# EAGLE board substractor-741_p-stm-v1.1 (EAGLE 6.5.0)
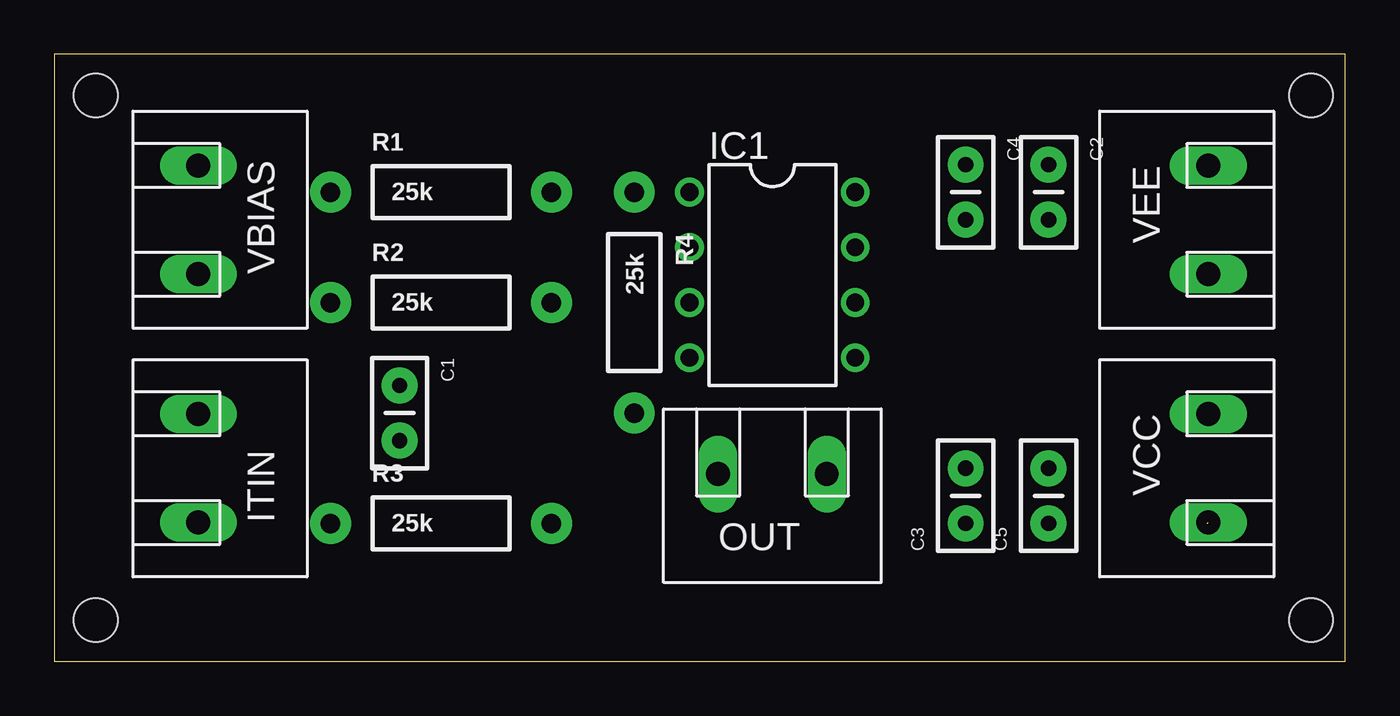
[diagram p0: board, top side]
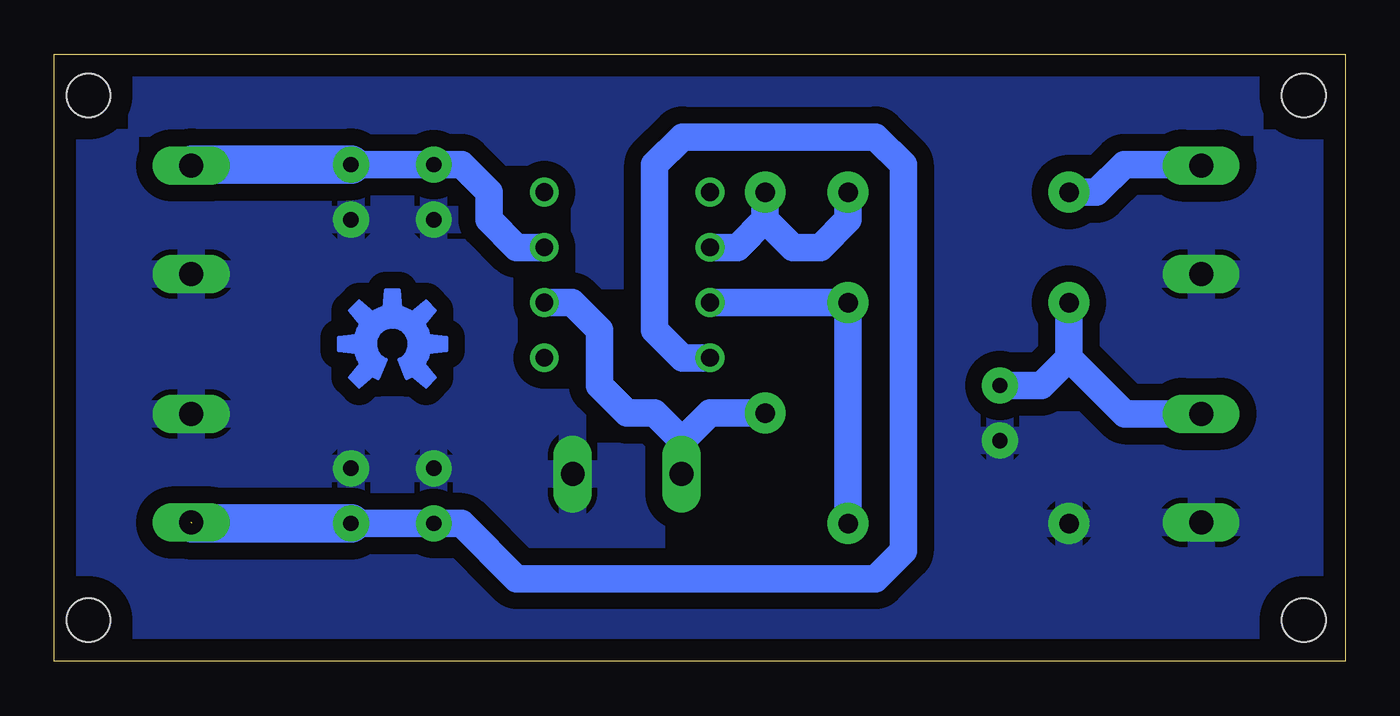
[diagram p1: board, bottom side, seen from below]

Size 59.36 x 27.93 mm. Coordinates in mm from the lower left corner, seen from the top.
Outline: 0,0 59.36,0 59.36,27.93 0,27.93 0,0
Copper layers (1*16): Top 0.035mm / dielectric 1.5mm / Bottom 0.035mm
Design rules "default": minimum track width 10mil, minimum drill 24mil, track to track 8mil, track to pad 8mil, pad to pad 8mil, via to via 8mil, smd to smd 8mil, copper to edge 40mil, drill to drill 8mil, minimum pad ring 10mil, minimum via ring 8mil, stop-mask expansion 4mil, vias tented up to drill 0mil, thermal gap 10mil
Holes 2 mm at 1.91,26.03 1.91,1.9 57.78,26.03 57.78,1.9

## Footprints (pad centres in the part's own frame; a part is rotated, then mirrored left to right if it is on the bottom)
CAP-PTH-SMALL2 = drill 0.7 pad 1.651: 1 0,0; 2 2.54,0
DIL08 = drill 0.813 pad 1.27: 1 -3.81,-3.81; 2 -1.27,-3.81; 3 1.27,-3.81; 4 3.81,-3.81; 5 3.81,3.81; 6 1.27,3.81; 7 -1.27,3.81; 8 -3.81,3.81
M02-NANOBEES = drill 1.1 pad 1.778 long: 1 -2.5,1; 2 2.5,1
AXIAL-0.4 = drill 0.9 pad 1.88: P$1 -5.08,0; P$2 5.08,0

## Placement (x,y rotation side)
C1  1 uf  [CAP-PTH-SMALL2]  15.88,12.7 270 top
C2  104 p/n?  [CAP-PTH-SMALL2]  45.72,22.86 270 top
C3  10 uf  [CAP-PTH-SMALL2]  41.91,6.35 90 top
C4  10 uf  [CAP-PTH-SMALL2]  41.91,22.86 270 top
C5  104 p/n?  [CAP-PTH-SMALL2]  45.72,6.35 90 top
FRAME1  FRAME-LETTER  [CREATIVE_COMMONS]  8.89,-7.62 0 top  (outside the outline)
IC1  LM741P  [DIL08]  33.02,17.78 270 top
ITIN  M02-NANOBEES  [M02-NANOBEES]  7.62,8.89 90 top
OUT  M02-NANOBEES  [M02-NANOBEES]  33.02,7.62 0 top
R1  25k  [AXIAL-0.4]  17.78,21.59 0 top
R2  25k  [AXIAL-0.4]  17.78,16.51 0 top
R3  25k  [AXIAL-0.4]  17.78,6.35 0 top
R4  25k  [AXIAL-0.4]  26.67,16.51 270 top
U$1  [OSHW-LOGO-M]  43.81,14.6 0 top
VBIAS  M02-NANOBEES  [M02-NANOBEES]  7.62,20.32 90 top
VCC  M02-NANOBEES  [M02-NANOBEES]  52.07,8.89 270 top
VEE  M02-NANOBEES  [M02-NANOBEES]  52.07,20.32 270 top

## Library data of the parts
C1-C5 = SparkFun-Capacitors
FRAME1 U$1 = SparkFun-Aesthetics
IC1 = linear
ITIN OUT VBIAS VCC VEE = SparkFun-Connectors
R1-R4 = SparkFun-Resistors

## Nets
GND: C1.2 C2.2 C3.2 C4.2 C5.2 ITIN.1 OUT.2 R3.P$1 VBIAS.1 VCC.1 VEE.2
N$1: R1.P$1 VBIAS.2
N$2: C1.1 ITIN.2 R2.P$1
N$3: IC1.2 R1.P$2 R4.P$1
N$4: IC1.3 R2.P$2 R3.P$2
N$5: IC1.6 OUT.1 R4.P$2
VCC: C2.1 C4.1 IC1.7 VEE.1
VNEG: C3.1 C5.1 IC1.4 VCC.2

## Tracks (layer width: path | path; a pad name or v marks a point on that pad's centre or on a via)
GND
  pour Bottom (isolate 0.762): 0,27.94 0,0 59.69,0 59.69,27.94
N$1
  Bottom 1.27: VBIAS.2 7.93,22.86 10.16,22.86 11.43,21.59 R1.P$1
N$2
  Bottom 1.27: R2.P$1 12.7,13.97 | 12.7,13.97 13.97,12.7 C1.1 | 12.7,13.97 10.12,11.39 ITIN.2
N$3
  Bottom 1.27: IC1.2 27.94,19.05 26.67,20.32 | R4.P$1 26.67,20.32 | 26.67,20.32 25.4,19.05 24.13,19.05 22.86,20.32 R1.P$2
N$4
  Bottom 1.27: R3.P$2 R2.P$2 IC1.3
N$5
  Bottom 1.27: R4.P$2 29.21,11.43 30.52,10.12 | 30.52,10.12 OUT.1 | IC1.6 35.56,16.51 34.29,15.24 34.29,12.7 33.02,11.43 31.75,11.43 30.52,10.2 30.52,10.12
VCC
  Bottom 1.27: C2.1 C4.1 40.64,22.86 39.37,21.59 39.37,20.32 38.1,19.05 IC1.7
  Bottom 1.778: VEE.1 53.03,22.86 C2.1
VNEG  (1 unrouted)
  Bottom 1.27: C5.1 C3.1 40.64,6.35 38.1,3.81 21.59,3.81 20.32,5.08 20.32,22.86 21.59,24.13 30.48,24.13 31.75,22.86 31.75,15.24 30.48,13.97 IC1.4
  Bottom 1.778: 53.03,6.35 C5.1

## Text on the board
tNames: Altug Yildirim